# EAGLE board v1 (EAGLE 7.3.0)
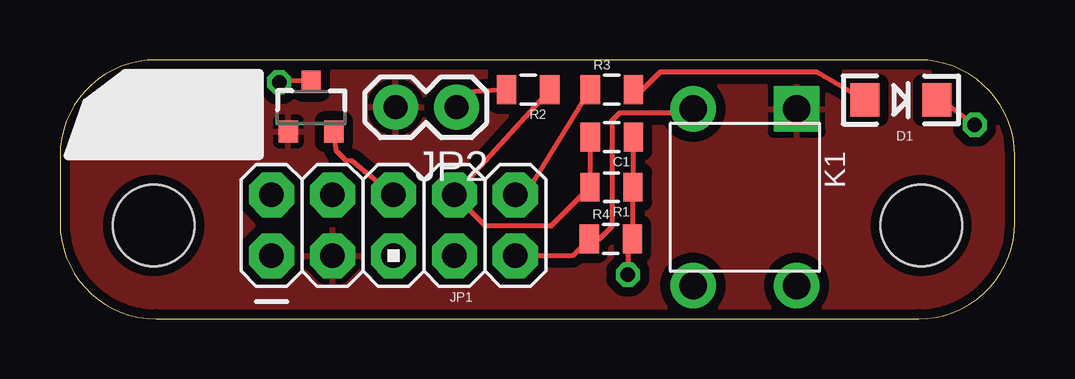
[diagram p0: board, top side]
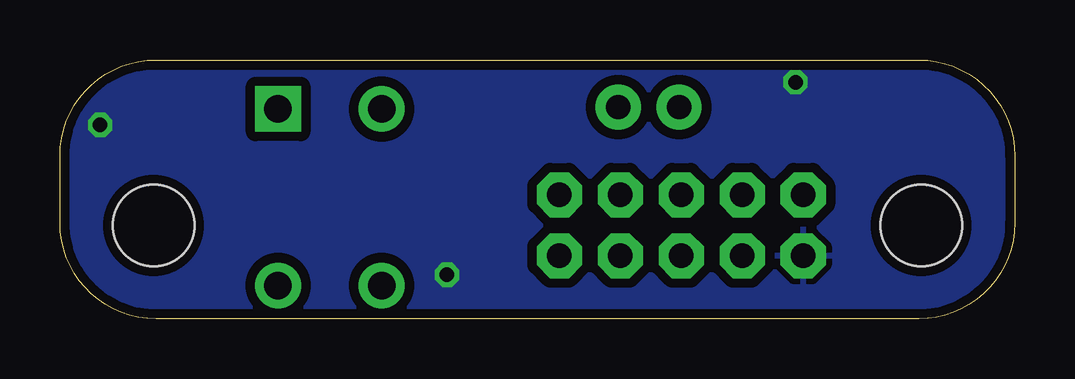
[diagram p1: board, bottom side, seen from below]

Size 39.8 x 10.8 mm. Coordinates in mm from the lower left corner, seen from the top.
Outline: 0,6.8 0,4 arc90 4,0 35.8,0 arc90 39.8,4 39.8,6.8 arc90 35.8,10.8 4,10.8 arc90 0,6.8
Copper layers (1*16): Top 0.035mm / dielectric 1.5mm / Bottom 0.035mm
Design rules "DFRobot_Eagle_Rule_v0.4": minimum track width 6mil, minimum drill 12mil, track to track 6mil, track to pad 6mil, pad to pad 6mil, via to via 6mil, smd to smd 0mil, copper to edge 10mil, drill to drill 10mil, minimum pad ring 12mil, minimum via ring 8mil, stop-mask expansion 2mil, vias tented up to drill 25mil, thermal gap 10mil
Holes 3.4 mm at 3.9,3.9 35.9,3.9

## Footprints (pad centres in the part's own frame; a part is rotated, then mirrored left to right if it is on the bottom)
0805 = smd 0.8 x 1.2: 1 -0.9,0; 2 0.9,0
LED-1206 = smd 1.2 x 1.4: A -1.5,0; C 1.5,0
AVR_ICSP = drill 1.016 pad 1.88 octagon: 1 -1.27,5.08; 2 1.27,5.08; 3 -1.27,2.54; 4 1.27,2.54; 5 -1.27,0; 6 1.27,0; 7 -1.27,-2.54; 8 1.27,-2.54; 9 -1.27,-5.08; 10 1.27,-5.08
1X02 = drill 1.016 pad 1.88: 1 0,0; 2 2.54,0
SW4-6.0X6.0X5.0MM = drill 1.143 pad 1.905 square: 1 -3.683,2.159 | drill 1.143 pad 1.905: 2 -3.683,-2.159; 3 3.683,-2.159; 4 3.683,2.159
SOT23-3 = smd 0.8 x 0.9: 1 -0.95,-1; 2 0.95,-1; 3 0,1.1

## Placement (x,y rotation side)
C1  [0805]  23,7.58 180 top
D1  [LED-1206]  35.05,9.13 0 top
JP1  [AVR_ICSP]  13.9,3.9 90 top
JP2  [1X02]  16.53,8.83 180 top
K1  TS-1109  [SW4-6.0X6.0X5.0MM]  28.55,5.07 270 top
R1  [0805]  22.99,5.49 180 top
R2  [0805]  19.52,9.56 180 top
R3  [0805]  23,9.56 0 top
R4  [0805]  22.96,3.33 0 top
U$1  MCP9700SMD  [SOT23-3]  10.47,8.81 0 top

## Library data of the parts
C1 = SparkFun-Capacitors
D1 = SparkFun-LED
JP1 JP2 = SparkFun-Connectors
K1 = Seeed-OPL-Button
R1-R4 = SparkFun-Passives
U$1 = SparkFun-Sensors; PROD_ID: IC-08917

## Nets
GND: C1.1 D1.C JP1.1 R1.1 R4.2 U$1.3
N$1: JP1.9 K1.2 R4.1
N$2: JP2.1 R2.2
N$4: D1.A R3.2
N$5: JP1.10 R3.1
N$8: JP1.6 U$1.2
N$9: C1.2 JP1.8 R1.2 R2.1
VDD: JP1.3 JP2.2 K1.1 U$1.1

## Tracks (layer width: path | path; a pad name or v marks a point on that pad's centre or on a via)
GND  (via drill 0.6)
  Top 0.2: D1.C 36.47,9.33 v38.13,8.09 | U$1.3 9.28,9.94 v9.14,9.87 | C1.1 R1.1 23.86,5.46 R4.2 23.67,3.14 v23.67,1.84
  pour Bottom (isolate 0.4): 0.1,10.6 39.6,10.6 39.6,0.2 0.2,0.2 0.2,3.5
N$1
  Top 0.2: 18.98,2.75 JP1.9 21.36,2.63 R4.1 22.49,3.33 23.01,3.85 23.01,8.27 23.33,8.59 26.23,8.59 K1.2
N$2
  Top 0.2: R2.2 17.02,9.45 JP2.1
N$4
  Top 0.2: D1.A 31.55,10.29 25.01,10.28 23.97,9.24 R3.2
N$5
  Top 0.2: R3.1 19.63,5.57 JP1.10
N$8
  Top 0.2: U$1.2 11.49,7.04 11.9,6.63 12.17,6.6 JP1.6
N$9
  Top 0.2: R2.1 16.47,5.2 JP1.8 17.74,3.87 20.47,3.87 R1.2 C1.2
VDD
  pour Top (isolate 0.4): 0,0 39.7,0 39.7,10.7 0.3,10.7 0.3,5.6